# Altium PCB MDBT42Q - Copy (6).PcbDoc
Units mm, origin at the board's own origin, x right, y up, seen from the top; angles counter-clockwise.
Board outline 105.25 x 26.75 mm, 2 copper layers (Top Layer, Bottom Layer); 38 components, 27 nets, 160 pads, 4 vias.
Unrouted connection lines stored in the file: 1.
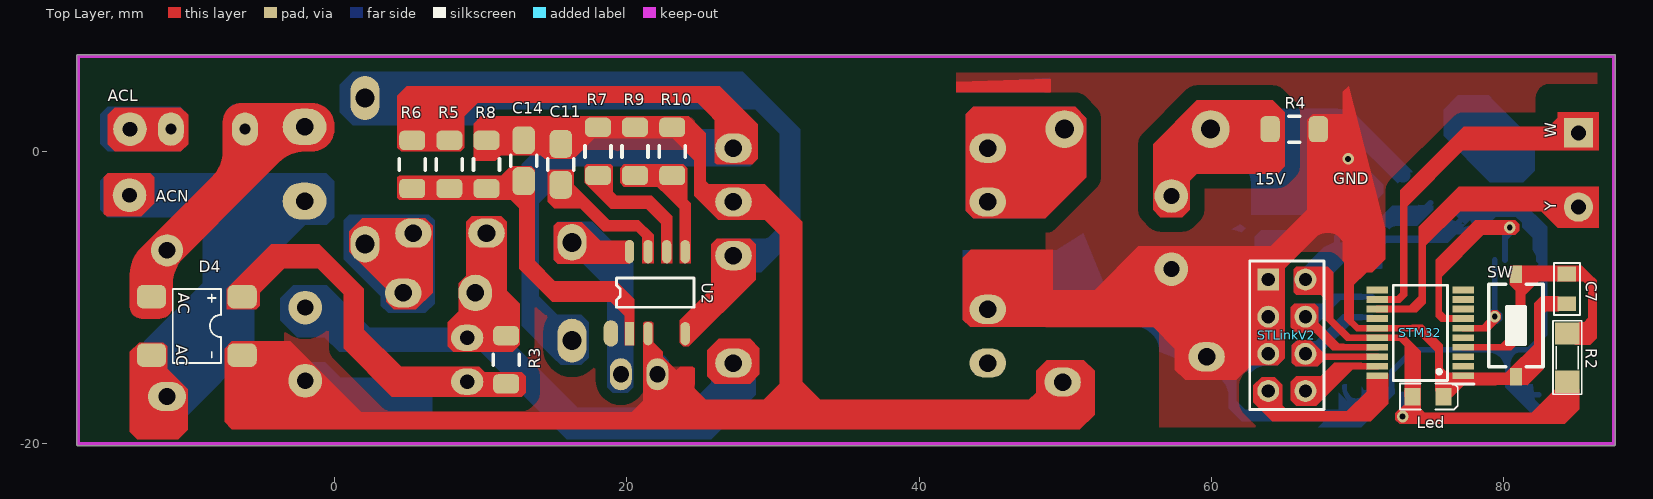
[diagram p0: Top Layer view]
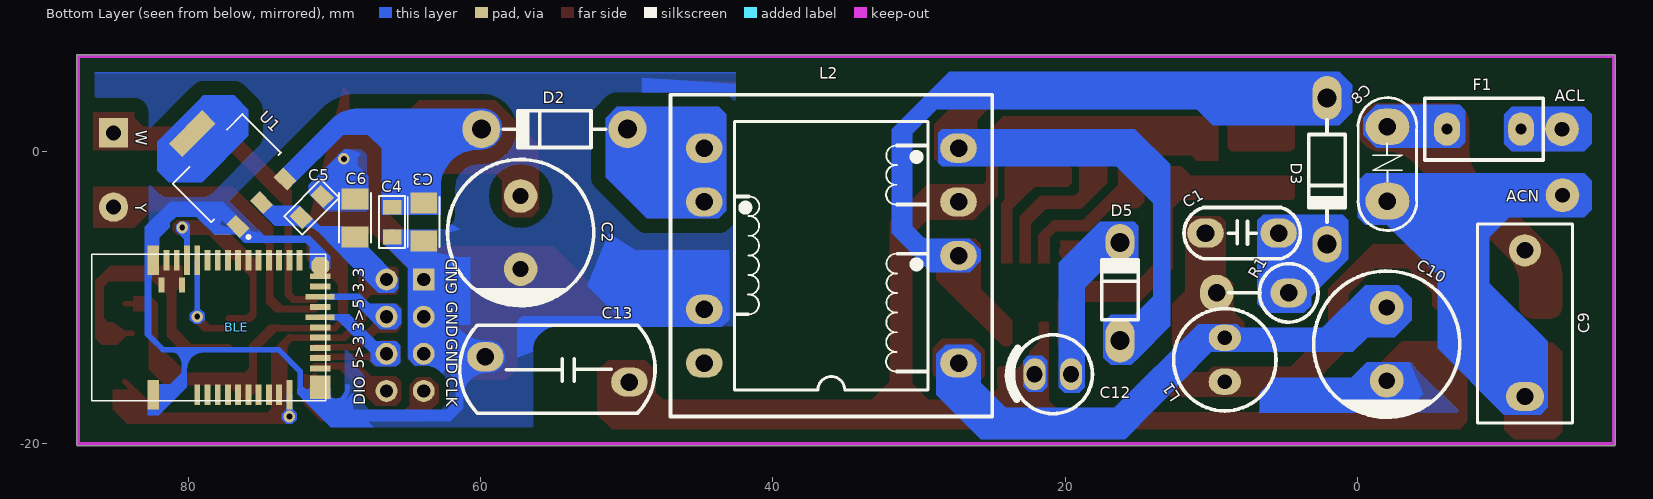
[diagram p1: Bottom Layer view, seen from below]

## Layer stack, top to bottom
Top Solder: solder mask 0.0102, Solder Resist, Dk 3.5
Top Layer: signal copper 0.0356
Dielectric1: dielectric 0.32, FR-4, Dk 4.8
Bottom Layer: signal copper 0.0356
Bottom Solder: solder mask 0.0102, Solder Resist, Dk 3.5

## Board outline
-17.5,-20.127 cw(c-17.5,-20) -17.627,-20 -17.627,6.5 cw(c-17.5,6.5) -17.498,6.627 87.5,6.627 cw(c87.5,6.5) 87.627,6.5 87.627,-20 cw(c87.5,-20) 87.5,-20.127

## Design rules (kind name [scope] priority, off if disabled: settings)
Clearance [All] p1: gap=1 ignorepadtopadclearanceinfootprint=FALSE
PlaneClearance [All] p1: clearance=1
PlaneConnect [All] p1: planeconnectstyle=Direct reliefexpansion=0.508 reliefentries=4 reliefconductorwidth=0.254 reliefairgap=0.254
PolygonConnect [All] p1: connectstyle=Direct reliefconductorwidth=0.254 reliefentries=4 polygonreliefangle="90 Angle" airgapwidth=0.254
RoutingVias [All] p1: holewidth=0.711 width=1.27 viastyle="Through Hole" minholewidth=0.711 minwidth=1.27 maxholewidth=0.711 maxwidth=1.27
SolderMaskExpansion [All] p1: expansion=0.102
Width [All] p1: maxlimit=1.016 minlimit=0.254 preferedwidth=0.635 minimp=50.000000 maximp=50.000000 favimp=50.000000
28 further rules are at their usual default settings.

## Components (designator, comment, footprint, x,y, rotation, side; value= is the part's Value field where it differs from the comment)
BLE "MODULE_MDBT42Q" PCB_MDBT42Q_10X16 86.572,-12.037 r90 bottom
C1 "1nF/1KV" 1nF/1KV 7.914,-5.588 r180 bottom
C2 "220uF/25V" 220uF/25V 57.252,-5.552 r90 bottom
C3 "C3216X5R1A106K160AB" CAPC3216X180 63.881,-4.826 r270 bottom
C4 "2u2" 0805C-GENERIC 66.04,-4.077 r270 bottom
C5 "2u2" 0805C-GENERIC 72.083,-4.342 r135 bottom
C6 "C3216X5R1A106K160AB" CAPC3216X180 68.58,-4.547 r90 bottom
C7 "10u" 0805C-GENERIC 84.303,-8.636 r270 top
C8 "FNR07K561" FNR07K561 -12.453,-68.342 r270 bottom
C9 "104/305V MKP" "104/305V MKP" -11.43,-11.764 r270 bottom
C10 "4.7uF/400V" 4.7uF/400V -1.981,-13.183 r180 bottom
C11 "68pF/50V" Cap_X 15.494,-0.889 r0 top
C12 "10uF/50V" 10uF/50V 20.848,-15.24 r180 bottom
C13 "2.2nF" "CAP ISOLATOR" 54.737,-14.91 r180 bottom
C14 "68pF/50V" Cap_X 12.954,-0.635 r0 top
D2 "SF18G" SF18G 54.944,1.524 r90 bottom
D3 "FR107" FR107 2.108,-1.346 r0 bottom
D4 "ABS16" ABS16 -9.398,-11.938 r270 top
D5 "FR107" "RF107 dung" 16.256,-9.581 r180 bottom
F1 "1A" "Cau chi hop 1A" -8.636,1.524 r180 bottom
L1 "3mH" INDUCTOR_x 9.093,-14.249 r270 bottom
L2 "EFD20" MBA-9 36.004,-7.128 r180 bottom
Led "LED SMD" LED_0805_Blue 74.803,-16.764 r0 top (schematic designator D1)
R1 "120K ohm" "R1W dung" 7.722,-9.677 r90 bottom value=1K
R2 "RESISTOR SMD" RES-SM-1206 84.328,-12.446 r270 top value=1K
R3 "5K6" RES_X#1 11.76,-14.249 r90 top
R4 "10K" RES_X#2 65.657,1.524 r180 bottom
R5 "33K" RES_X#1 7.874,-0.887 r270 top
R6 "33K" RES_X#1 5.334,-0.887 r270 top
R7 "0R" RES_X#1 18.034,0 r90 top
R8 "5K6" RES_X#1 10.414,-0.891 r90 top
R9 "2R7" RES_X#1 20.574,0 r270 top
R10 "2R7" RES_X#1 23.114,0 r90 top
STLinkV2 "Header 4X2" HDR2X4 63.881,-8.763 r270 top
STM32 "STM32F070F6P6" SOP65P640X120-20N 74.278,-12.405 r180 top
SW "SW-SMD" SW-SMD 80.823,-11.907 r270 top
U1 "AMS1117-3.3" SOT229P700X180-4N 77.343,-1.143 r135 bottom
U2 "IC MP024-10" MP024-10 22.098,-9.652 r0 bottom

## Footprints (in the part's own frame and the unit in brackets; to place one, negate y for a bottom-side part, rotate by r counter-clockwise, add the part's x,y. Pads: shape width x height; smd on the part's side, far side on the other; paste and mask are expansions set on the pad)
1nF/1KV [mm]
  oval 2.5x2 hole 1.2: 1(-2.5,0) 2(2.5,0)
  silkscreen extent -3.97,-1.75 3.99,1.75
4.7uF/400V [mm]
  round 2.3 hole 1.1 mask+0.127: 1(0,2.5) 2(0,-2.5)
  silkscreen extent -5,-5.02 5,5
10uF/50V [mm]
  oval 1.5x2.2 hole 1.1 mask+0.106: 1(1.25,0) 2(-1.25,0)
  silkscreen extent -3.05,-2.7 2.7,2.7
"104/305V MKP" [mm]
  round 2.2 hole 1.15: 1(-5,0)
  oval 2x2.6 hole 1.15: 2(5,0)
  silkscreen extent -6.8,-3.25 6.8,3.25
220uF/25V [mm]
  round 2.3 hole 1.1 mask+0.127: 1(2.5,0) 2(-2.5,0)
  silkscreen extent -5.02,-5 5,5
0805C-GENERIC [mil] "CAPACITOR 0805"
  rect 40x50 smd: 1(-10,0) 2(70,0)
  silkscreen extent -40,-35 100,35, body extent -11,-25 70,25, height 26
ABS16 [mm]
  rrect50% 1.6x2 smd: 1(2,-3.1) 2(-2,3.1) 3(-2,-3.1) 4(2,3.1)
  silkscreen extent -2.54,-1.65 2.54,1.65
"CAP ISOLATOR" [mm]
  oval 2.5x2 hole 1.2: 1(4.925,-0.862) 2(-4.925,0.863)
  silkscreen extent -6.68,-2.99 6.68,3.01
Cap_X [mil] "SMD, no Pol"
  rrect50% 60x75 smd: 1(0,-55) 2(0,55)
  silkscreen extent -35,-15 35,15
CAPC3216X180 [mm]
  rect 1.44x1.82 smd: 1(-1.295,0) 2(1.295,0)
  silkscreen extent -1.7,-1.09 1.7,1.09
"Cau chi hop 1A" [mil]
  oval 70x90 hole 30: 1(-100,0) 2(100,0)
  silkscreen extent -159,-83 160,83
FNR07K561 [mm]
  oval 2.5x3 hole 1.2: 1(-70.018,-10.421)
  oval 2.53x3 hole 1.2: 2(-64.938,-10.421)
  silkscreen extent -72.02,-12.43 -62.93,-8.42
FR107 [mm]
  oval 2x3 hole 1.3: 1(0,-5)
  oval 2x2.5 hole 1.3: 2(0,5)
  silkscreen extent -1.25,-3.5 1.25,3.5
HDR2X4 [mm] "Connector; Header; 4x2 Position"
  rect 1.5x1.5 hole 0.9: 1(0,0)
  round 1.5 hole 0.9: 2(0,2.54) 3(2.54,0) 4(2.54,2.54) 5(5.08,0) 6(5.08,2.54) 7(7.62,0) 8(7.62,2.54)
  silkscreen extent -1.27,-1.27 8.89,3.81, body extent -1.27,-1.27 8.89,3.81, height 7
INDUCTOR_x [mm]
  oval 1.8x2.2 hole 1 mask+0.106: 1(1.5,0) 2(-1.5,0)
  silkscreen extent -3.5,-3.5 3.5,3.5
LED_0805_Blue [mm] "Chip LED, 2-Leads, Body 2.0x1.3mm, IPC Medium Density"
  rect 1.1x1.2 smd: 1(-1.05,0) 2(1.05,0)
  silkscreen extent -1.91,-0.89 2.03,0.89, body extent -1,-0.63 1,0.62, height 0.68
MBA-9 [mm]
  oval 2.5x2 hole 1.2: 1(8.7,-7.35) 3(8.7,0) 4(8.7,3.675) 5(8.7,7.35) 6(-8.7,7.35) 7(-8.7,3.675) 9(-8.7,-3.675) 10(-8.7,-7.35)
  round 0 all layers, no hole: 2(8.7,-3.675)
  silkscreen extent -11,-11 11,11
MP024-10 [mm]
  oval 1x1.8 smd far side: 0(-3.175,2.794)
  rect 0.635x1.6 smd far side: 1(-1.904,2.81)
  oval 0.635x1.6 smd far side: 2(-0.634,2.81) 4(1.906,2.81) 5(1.906,-2.798) 6(0.636,-2.798) 7(-0.634,-2.798) 8(-1.904,-2.798)
  body extent -2.5,-1.99 2.5,2.01, height 1.75
PCB_MDBT42Q_10X16 [mm]
  rect 2x0.8 smd: 1(-4.6,-4.2) 39(4.6,-4.2)
  rect 1.4x0.4 smd: 2(-4.6,-7.2) 3(-4.6,-7.9) 4(-4.6,-8.6) 5(-4.6,-9.3) 6(-4.6,-10) 7(-4.6,-10.7) 8(-4.6,-11.4) 9(-4.6,-12.1) 10(-4.6,-12.8) 25(4.6,-14.2) 26(4.6,-13.5) 27(4.6,-12.8) 28(4.6,-12.1) 29(4.6,-11.4) 30(4.6,-10.7) 31(4.6,-10) 32(4.6,-9.3) 33(4.6,-8.6) 34(4.6,-7.9) 37(4.6,-5.8) 38(4.6,-5.1)
  rect 2x0.4 smd: 11(-4.6,-13.5) 35(4.6,-7.2) 36(4.6,-6.5)
  rect 1.4x1.4 smd: 12(-4.2,-15.6)
  rect 0.4x1.4 smd: 13(-3.5,-15.6) 14(-2.8,-15.6) 15(-2.1,-15.6) 16(-1.4,-15.6) 17(-0.7,-15.6) 18(0,-15.6) 20(1.4,-15.6) 22(2.8,-15.6) 23(3.5,-15.6)
  rect 0.4x2 smd: 19(0.7,-15.6) 21(2.1,-15.6)
  oct 1.2x1.2 smd: 24(4.2,-15.6)
  rect 1x0.4 smd: 40(2.9,-4.75) 41(2.9,-6.15)
  silkscreen extent -5,-16 5,0
"R1W dung" [mm]
  oval 2x2.5 hole 1.2: 1(0,-3)
  oval 2.5x2.3 hole 1.2: 2(0,1.93)
  silkscreen extent -2,-5 2,1.1
RES-SM-1206 [mil]
  rect 60x65 smd: 1(0,0) 2(130,0)
  silkscreen extent -34,-38 164,39, body extent 2,-31 128,31, height 40
RES_X#1 [mm]
  rrect50% 1.32x1.778 smd: 1(-1.649,0) 2(1.649,0)
  silkscreen extent -0.38,-0.89 0.38,0.89
RES_X#2 [mm]
  rrect50% 1.32x1.778 smd far side: 1(-1.649,0) 2(1.649,0)
"RF107 dung" [mm]
  oval 2x3 hole 1.3: 1(0,-3.358)
  oval 2x2.5 hole 1.3: 2(0,3.358)
  silkscreen extent -1.25,-1.94 1.27,2.17
SF18G [mm]
  round 2.6 hole 1.3: 1(0,-5) 2(0,5)
  silkscreen extent -1.25,-3.5 1.25,3.5
SOP65P640X120-20N [mm]
  rect 1.475x0.45 smd: 1(-2.938,2.925) 2(-2.938,2.275) 3(-2.938,1.625) 4(-2.938,0.975) 5(-2.938,0.325) 6(-2.938,-0.325) 7(-2.938,-0.975) 8(-2.938,-1.625) 9(-2.938,-2.275) 10(-2.938,-2.925) 11(2.938,-2.925) 12(2.938,-2.275) 13(2.938,-1.625) 14(2.938,-0.975) 15(2.938,-0.325) 16(2.938,0.325) 17(2.938,0.975) 18(2.938,1.625) 19(2.938,2.275) 20(2.938,2.925)
  silkscreen extent -3.68,-3.25 1.85,3.5, body extent -2.25,-3.3 2.25,3.3
SOT229P700X180-4N [mm]
  rect 0.93x1.31 smd: 1(-2.29,-3.345) 2(0,-3.345) 3(2.29,-3.345)
  rect 3.24x1.31 smd: 4(0,3.345)
  silkscreen extent -3.36,-4.47 3.36,1.86
SW-SMD [mm] "Switch SMD type"
  rect 1.2x0.8 smd: 1(-3.5,0) 2(3.5,0)
  silkscreen extent -2.82,-1.85 2.82,1.85, body extent -3.05,-1.85 3.05,1.85, height 2.5

## Part data
BLE: "MDBT42Q"
C1 C11 C13 C14: library part CAP, "Capacitor"
C2 C10 C12: library part ELECTRO0
C3: "C Series 1206 10 uF 10 V ±10 % Tolerance X5R SMT Multilayer Ceramic Capacitor. T? Tantalium", Package="1206 TDK", Availability=Unavailable, MF=TDK, MP=C3216X5R1A106K160AB, Price="0.19 USD", SnapEDA_Link=https://www.snapeda.com/parts/C3216X5R1A106K160AB/TDK/view-part/?ref=snap
C4 C5 C7: library part 0805C-2U2-6V3-X5R-PAN, "CAPACITOR 0805 CERAMIC", Manufacturer="Panasonic - ECG", Manufacturer Part Number=ECJ-1VB0J225K, Supplier Part Number 1=PCC2273TR-ND, Reel=C7, Supplier 1=Digi-Key
C6: "C Series 1206 10 uF 10 V ±10 % Tolerance X5R SMT Multilayer Ceramic Capacitor", Package="1206 TDK", Availability=Unavailable, MF=TDK, MP=C3216X5R1A106K160AB, Price="0.19 USD", SnapEDA_Link=https://www.snapeda.com/parts/C3216X5R1A106K160AB/TDK/view-part/?ref=snap
C8 C9: library part Cap, "Capacitor"
D2: library part DIODE, "Diode"
D3 D5: library part DIODE0
D4: library part BRIDGE1, "Diode Bridge"
F1: library part Res, "Resistor"
L1: library part INDUCTOR1
L2: library part TRANS-EE
Led: "LED"
R1: library part RESC, "Resistor"
R2: "Resistor"
R3 R4 R5 R6 R7 R8 R9 R10: library part RES1A
STLinkV2: "Header, 4-Pin, Dual row", LatestRevisionDate=17-Jul-2002, LatestRevisionNote="Re-released for DXP Platform.", Publisher="Altium Limited"
STM32: "STMICROELECTRONICS - STM32F070F6P6 - MCU, 32BIT, CORTEX-M0, 48MHZ, TSSOP-20", Manufacturer_Name=STMicroelectronics, Arrow Part Number=STM32F070F6P6, Arrow Price/Stock=https://www.arrow.com/en/products/stm32f070f6p6/stmicroelectronics, Datasheet Link=http://www.st.com/content/ccc/resource/technical/document/datasheet/31/4f/10/5f/a5/32/46/42/DM00141386.pdf/files/DM00141386.pdf/jcr:content/translations/en.DM00141386.pdf, Geometry.Height=1.2mm, Manufacturer_Part_Number=STM32F070F6P6
SW: "Switch", LatestRevisionDate=17-Jul-2002, LatestRevisionNote="Re-released for DXP Platform.", PackageReference=SPST-2, Published=24-Mar-1999, Publisher="Altium Limited"
U1: "Sot223/Pkg 1-Amp 3.3-Volt Low Drop Out Voltage Regulatator", Package=None, Availability=Unavailable, MF="Advanced Monolithic Systems", MP=AMS1117-3.3, Price=None, SnapEDA_Link=https://www.snapeda.com/parts/AMS1117-3.3/Advanced%20Monolithic%20Systems/view-part/?ref=snap

## Free pads (board coordinates)
  rect 2x2 hole 1.016: 4(85.09,1.27)
  round 2 hole 1.016: 5(85.09,-3.81)
  round 2.3 hole 1: 7(-13.97,1.524) 8(-14,-3)

## Via types
v1: diameter 0.8, hole 0.4, Top Layer to Bottom Layer, 4 vias

## Nets (pads, with @x,y where several pads share a name; then routed paths per layer and width w, separated by ;. In a path a pad name is that pad's centre, name@x,y a point inside that pad or via, vN(x,y) a via of type N, cw(c..) or ccw(c..) an arc to the next point about the centre after c; other vN are vias at no path point)
32>52: BLE.21 STLinkV2.4 STM32.17 | length 10.9
  Top Layer w0.381: STLinkV2.4 68.498,-13.38
  Top Layer w0.45: 68.498,-13.38 STM32.17
  Bottom Layer w0.381: STLinkV2.4 67.128,-11.303 68.494,-9.937 BLE.21
52>32: BLE.19 STLinkV2.6 STM32.18 | length 10.6
  Top Layer w0.381: STLinkV2.6 STLinkV2.6@66.608,-14.03
  Top Layer w0.45: STLinkV2.6@66.608,-14.03 STM32.18
  Bottom Layer w0.381: STLinkV2.6 66.911,-13.843 69.417,-11.337 BLE.19
+3.3V: BLE.11 C5.1 C6.1 Led.1 R2.2 STLinkV2.2 STM32.16 U1.2 | length 40.5
  Top Layer w0.381: STLinkV2.2 67.691,-8.763 68.112,-9.184 68.112,-11.47 69.372,-12.73 ; 72.928,-12.73 73.753,-13.555 Led.1 ; v1(73.072,-18.132) 81.864,-18.212 R2.2 ; 73.753,-17.492 73.753,-17.451
  Top Layer w0.4: v1(73.072,-18.132) 73.753,-17.451 Led.1
  Top Layer w0.45: 69.372,-12.73 STM32.16 72.928,-12.73
  Bottom Layer w0.381: STLinkV2.2 68.58,-6.604 C6.1 70.496,-5.842 71.817,-4.521 C5.1 73.965,-4.521 U1.2
  Bottom Layer w0.4: v1(73.072,-18.132) BLE.11
+15V: C2.1 C3.1 C4.1 D2.2 R4.2 U1.3 | length 32
  Top Layer w1.016: C2.1 57.252,-0.737 59.512,1.524 D2.2 ; 63.881,-0.508 64.008,-0.381 R4.2
  Bottom Layer w0.381: C3.1 64.173,-3.823 C4.1
  Bottom Layer w1.016: D2.2 61.849,1.524 63.881,-0.508 ; C4.1 65.748,-3.531 C3.1 63.881,-0.508 ; U1.3@73.101,-1.632 69.691,1.778 66.167,1.778 63.881,-0.508
CLK: STLinkV2.7 STM32.20 | length 10.3
  Top Layer w0.381: STLinkV2.7 63.881,-17.399 64.549,-18.067 69.355,-18.067 71.34,-16.081 STM32.20
DIO: STLinkV2.8 STM32.19 | length 5.6
  Top Layer w0.45: STLinkV2.8 67.125,-16.383 68.828,-14.68 STM32.19
DRAIN: D3.1 L2.3 U2.4 | length 48.1
  Top Layer w0.635: U2.4 27.304,-9.162 L2.3
  Bottom Layer w1.016: D3.1 28.909,3.654 31.217,1.346 31.217,-5.41 29.499,-7.128 L2.3
GND: C10.2 C11.2 C12.2 C13.1 C14.2 D4.4 L2.4 R7.2 R8.2 R9.1 R10.2 U2.2 | length 104.1
  Top Layer w0.635: C14.2@12.95,0.758 C14.2 ; U2.2 21.464,-13.336 22.098,-13.97 C12.2 ; R10.2 23.863,1.649 25.004,0.508 25.004,-2.144 26.313,-3.453 L2.4
  Top Layer w1.016: D4.4@-6.315,-13.955 -4.587,-15.683 C10.2 0.65,-18.313 23.343,-18.313 24.13,-17.526 ; R8.2 C14.2@12.95,0.758 ; C14.2 14.732,0.762 15.24,0.254 C11.2 16.635,1.649 R7.2 R10.2 ; C12.2 22.098,-15.494 24.13,-17.526 ; L2.4 29.742,-3.453 31.242,-4.953 31.242,-16.307 30.023,-17.526 ; C13.1 48.058,-17.526 30.023,-17.526 ; 24.13,-17.526 30.023,-17.526
GND2: BLE.1 BLE.12 BLE.24 BLE.39 C2.2 C3.2 C4.2 C5.2 C6.2 C7.2 C13.2 L2.9 Led.2 R4.1 STLinkV2.1 STLinkV2.3 STLinkV2.5 STM32.1 STM32.15 SW.2 U1.1 | length 146.4
  Top Layer w0.381: STLinkV2.1 69.342,-3.302 ; v1@69.215,-0.381 v1(69.342,-0.508) 69.342,-3.302 ; 69.992,-12.08 69.342,-11.43 69.342,-3.302 ; 74.056,-12.08 75.573,-13.597 75.573,-14.847 76.056,-15.33 ; Led.2 77.216,-15.401 STM32.1 ; SW.2@80.745,-15.33 SW.2 ; SW.2@80.823,-15.502 82.372,-13.953 82.372,-11.227 83.185,-10.414 C7.2
  Top Layer w0.45: 69.992,-12.08 STM32.15 74.056,-12.08 ; 76.056,-15.33 STM32.1 SW.2@80.745,-15.33
  Top Layer w1.016: L2.9 52.976,-10.803 55.728,-8.052 C2.2 63.17,-8.052 STLinkV2.1 STLinkV2.3 ; C13.2 61.137,-14.047 STLinkV2.3 ; STLinkV2.5 STLinkV2.3 ; R4.1 67.31,1.524 v1@69.215,-0.381
  Bottom Layer w0.381: 63.119,-13.843 61.468,-15.494 61.468,-17.272 62.263,-18.067 69.708,-18.067 BLE.12@70.891,-16.884 ; BLE.12 70.972,-16.803 BLE.12@70.891,-16.884 ; BLE.24 70.972,-6.949 71.883,-6.038 75.687,-6.038 U1.1 77.61,-4.115 80.77,-4.115 82.372,-5.717 BLE.39 82.677,-7.742 82.677,-12.587 81.712,-13.552 80.264,-13.552 ; BLE.1 81.661,-16.637 80.264,-15.24 80.264,-13.552 ; BLE.12@70.891,-16.884 71.864,-16.884 72.339,-16.408 72.339,-15.037 73.824,-13.552 80.264,-13.552
  Bottom Layer w1.016: 63.119,-13.843 STLinkV2.5 ; STLinkV2.5@63.881,-13.85 STLinkV2.5 ; C4.2 65.774,-6.121 C3.2 STLinkV2.5 ; C6.2 C6.2@68.748,-3.084 ; v1(69.342,-0.508) 69.342,-2.49 C6.2@68.748,-3.084 ; C5.2 C6.2@68.748,-3.084
MD_RESET: BLE.35 STM32.6 | length 6.3
  Top Layer w0.381: 78.598,-12.08 v1@79.375,-11.303
  Top Layer w0.45: STM32.6 78.598,-12.08
  Bottom Layer w0.381: v1(79.372,-11.3) v1@79.375,-11.303
  Bottom Layer w0.4: v1(79.372,-11.3) BLE.35
NetC1_1: C1.1 C10.1 L1.2 L2.1 R1.2 R3.2 | length 47.1
  Top Layer w1.016: L1.2 11.611,-12.749 R3.2 11.76,-10.897 10.541,-9.677 R1.2 9.652,-6.35 C1.1
  Bottom Layer w1.016: C10.1 0.086,-12.749 L1.2 10.971,-12.749 13.487,-15.265 13.487,-16.002 15.672,-18.186 25.552,-18.186 27.304,-16.435 L2.1 L2.1@27.304,-14.35
NetC1_2: C1.2 D3.2 R1.1 | length 8.7
  Top Layer w1.016: R1.1@4.922,-10.16 R1.1@5.414,-9.668
  Bottom Layer w1.016: D3.2 2.866,-5.588 C1.2 5.414,-8.985 R1.1
NetC7_1: C7.1 R2.1 STM32.4 SW.1 | length 19.4
  Top Layer w0.381: 80.27,-13.38 81.204,-12.446 81.204,-8.788 SW.1 ; SW.1@80.899,-8.382 C7.1 85.496,-8.382 85.979,-8.865 85.979,-12.116 85.649,-12.446 R2.1 R2.1@83.82,-12.446
  Top Layer w0.45: STM32.4 80.27,-13.38
NetC8_1: C8.1 C9.1 D4.3 F1.1 | length 19.2
  Top Layer w1.016: D4.3 -12.498,-7.832 C9.1 -11.336,-6.764 -6.096,-1.524 F1.1 -2.184,1.524 C8.1 C8.1@-2.896,1.676
NetC8_2: C8.2 C9.2 D4.1 pad.8 | length 19.7
  Top Layer w1.016: D4.1 -12.498,-15.696 C9.2
  Bottom Layer w1.016: C9.2@-11.227,-15.994 -8.23,-12.997 -8.23,-10.262 -2.032,-4.064 C8.2
NetC11_1: C11.1 U2.7 | length 8.5
  Top Layer w0.635: C11.1 15.748,-2.286 18.542,-5.08 20.701,-5.08 21.464,-5.843 U2.7
NetC12_1: C12.1 D5.2 U2.8 | length 14.3
  Top Layer w1.016: D5.2 16.887,-6.854 U2.8@19.939,-6.854
  Bottom Layer w1.016: D5.2 19.598,-9.565 C12.1
NetC14_1: C14.1 R5.2 R6.2 R8.1 U2.1 | length 22.9
  Top Layer w0.635: R6.2 R5.2 10.41,-2.536 R8.1 12.7,-2.54 12.954,-2.286 12.954,-7.366 15.24,-9.652 18.714,-9.652 20.194,-11.132 U2.1
NetD2_1: D2.1 L2.7 | length 16.5
  Top Layer w1.016: L2.7 46.585,-3.453 49.944,-0.094 D2.1
  Bottom Layer w1.016: L2.7 46.585,-3.453 49.944,-0.094 D2.1
NetD4_2: D4.2 L1.1 R3.1 | length 24.4
  Top Layer w1.016: D4.2 -3.599,-7.239 -0.965,-7.239 1.321,-9.525 1.321,-12.395 4.675,-15.749 L1.1 11.611,-15.749 R3.1
NetD5_1: D5.1 L2.5 R5.1 R6.1 | length 54.2
  Top Layer w1.016: R5.1 R6.1 8.382,3.81 25.066,3.81 27.304,1.572 L2.5
  Bottom Layer w1.016: D5.1 13.462,-10.145 13.462,-3.277 16.961,0.222 L2.5
NetF1_2: F1.2 pad.7 | length 5.6
  Top Layer w1.016: pad.7 F1.2
  Bottom Layer w1.016: pad.7 F1.2
NetR7_1: R7.1 U2.6 | length 8.4
  Top Layer w0.635: R7.1 18.034,-2.159 19.431,-3.556 21.59,-3.556 22.734,-4.7 U2.6
NetR9_2: R9.2 R10.1 U2.5 | length 8.1
  Top Layer w0.635: R10.1 23.114,-2.794 24.004,-3.684 U2.5
  Top Layer w1.016: R9.2 R10.1
PWM_WHITE: pad.4 STM32.12 | length 22.3
  Top Layer w0.381: 72.674,-10.13 73.152,-9.652 73.152,-3.073 77.495,1.27 pad.4
  Top Layer w0.45: STM32.12 72.674,-10.13
PWM_YELLOW: pad.5 STM32.13 | length 19
  Top Layer w0.381: 73.548,-10.78 74.422,-9.906 74.422,-6.045 76.759,-3.708 84.988,-3.708 pad.5
  Top Layer w0.45: STM32.13 73.548,-10.78
SWDCLK: BLE.36 STM32.7 | length 13
  Top Layer w0.381: 75.946,-11.43 75.55,-11.034 75.55,-8.317 78.595,-5.271 v1@80.391,-5.271
  Top Layer w0.45: 75.946,-11.43 STM32.7
  Bottom Layer w0.4: BLE.36 80.072,-5.526 v1(80.391,-5.207)
pads on no net: BLE.2 BLE.3 BLE.4 BLE.5 BLE.6 BLE.7 BLE.8 BLE.9 BLE.10 BLE.13 BLE.14 BLE.15 BLE.16 BLE.17 BLE.18 BLE.20 BLE.22 BLE.23 BLE.25 BLE.26 BLE.27 BLE.28 BLE.29 BLE.30 BLE.31 BLE.32 BLE.33 BLE.34 BLE.37 BLE.38 BLE.40 BLE.41 L2.2 L2.6 L2.10 STM32.2 STM32.3 STM32.5 STM32.8 STM32.9 STM32.10 STM32.11 STM32.14 U1.4 U2.0

## Polygon pours and split planes (outlines as drawn)
GND2 on Top Layer "NONET_L-01_P-001" (solid, pour order 21): 42.545,6.5 42.545,-12.014 56.413,-12.014 56.413,-20 87.5,-20 87.5,6.5 87.376,6.5
GND on Top Layer "NONET_L-01_P-001" (solid, remove dead copper, pour order 19): -17.5,6.5 29.21,6.5 29.21,-20 -17.5,-20
no net on Top Layer "NONET_L-01_P-001" (solid, pour order 17): -17.145,6.223
no net on Top Layer "NONET_L-01_P-001" (solid, pour order 15): 81.941,0.064
no net on Top Layer "NONET_L01_P011" (solid, pour order 11): -5.58,-16.191
GND2 on Top Layer "GND2_L01_P001" (solid, pour order 1): -4.546,-17.92
GND2 on Bottom Layer "NONET_L-01_P-001" (solid, pour order 27): 87.5,-20 56.388,-20 56.388,-11.963 42.545,-11.963 42.545,6.5 87.5,6.5
GND on Bottom Layer "NONET_L-01_P-001" (solid, remove dead copper, pour order 23): -17.5,6.5 29.845,6.5 29.845,-20 -17.5,-20
no net on Bottom Layer "NONET_L-01_P-001" (solid, pour order 25): 42.545,5.363 86.363,5.363

## Keep-outs
Keep-Out Layer:
  lines w0.254: -17.5,-20 -17.5,6.5 87.5,6.5 87.5,-20 -17.5,-20

## Other copper
Top Layer:
  region net GND2: 67.108,-5.893 cw(c67.871,-6.656) 67.871,-5.576 68.021,-5.576 cw(c68.021,-6.647) 69.088,-6.565 69.088,-11.499 69.893,-12.304 70.05,-12.304 70.036,-11.855 69.723,-11.543 69.723,1.905 69.088,2.54 66.929,2.54 66.548,2.159 66.548,-3.994 64.042,-6.5 55,-6.5 52,-9.5 49.149,-9.5 49.149,-6.731 43.536,-6.731 43,-7.267 43,-10.846 43,-11.5 43.5,-12 56,-12 57.5,-13.5 57.5,-14.921 58.209,-15.63 61.694,-15.63 62.712,-14.612 64.528,-14.612 65,-14.14 65,-8
  region: -5.402,-2.336 -5.393,-2.345 -3.792,-0.744 cw(c-1.996,-2.54) -1.996,0 -1.524,0 ccw(c-1.524,1.524) 0,1.524 0,1.778 ccw(c-1.524,1.778) -1.524,3.302 -6.35,3.302 ccw(c-6.35,2.032) -7.62,2.032 -7.62,0.036 cw(c-10.16,0.036) -8.364,-1.76 -13.226,-6.622 ccw(c-11.43,-8.418) -13.97,-8.418 -13.97,-10.668 ccw(c-13.208,-10.668) -13.208,-11.43 -11.938,-11.43 ccw(c-11.938,-10.541) -11.049,-10.541 -11.049,-9.053 cw(c-8.509,-9.053) -10.305,-7.257 -5.57,-2.522 ccw(c-7.366,-0.726)
  region net GND2: 42.545,4.765 42.545,4.057 49.017,4.057 49.017,4.986
  region: 78.593,-12.305 78.968,-12.305 79.785,-11.488 79.785,-11.119 79.54,-10.874 79.202,-10.874 78.957,-11.119 78.957,-11.419 78.364,-12.013 77.232,-12.013
  region net GND2: 71.889,-5.285 71.889,-7.359 70.993,-8.255 70.612,-8.255 69.672,-9.195 69.367,-8.89 69.088,-8.89 69.088,-7.591 68.965,-7.468 68.965,4.068 69.367,4.47
  pour cut-out: 73.804,-17.098 74.302,-16.165 74.16,-16.307 73.455,-16.307 73.455,-16.748
  region net +3.3V: 84.141,-18.634 85.152,-17.624 85.152,-16.316 83.883,-16.316 83.795,-16.404 83.795,-16.203 83.577,-16.203 81.899,-17.881 74.589,-17.881 74.303,-17.597 74.303,-13.663 73.142,-12.502 72.908,-12.502 72.801,-12.918 73.204,-13.32 73.204,-16.307 73.195,-16.316 73.204,-17.291 72.573,-17.923 72.568,-18.341 72.861,-18.634
  pour cut-out: 51.938,-17.898 52,-17.898 51.882,-17.842
  region net GND: 24.5,-19 51,-19 52,-18 52,-17.898 51.938,-17.898 51.882,-17.842 52,-17.898 52,-15 51.275,-14.275 48.725,-14.275 48,-15 48,-16.5 47.5,-17 25.413,-17 24.593,-16.18 24.645,-15.852 24.645,-14.84 24.518,-14.713 23.666,-14.713 23.396,-14.983 22.47,-14.057 22.47,-13.707 21.8,-13.037 21.8,-11.726 21.713,-11.639 21.221,-11.639 21.148,-11.712 21.148,-11.964 21.145,-12.205 21.145,-17.054 20.072,-18.128 2.128,-18.128 -3,-13 -7,-13 -7.5,-13.5 -7.5,-18.5 -7,-19
  region net GND: 24.781,-18.527
  region net GND: 24.638,-0.609 24.638,-3.048 26.264,-4.674 29.439,-4.674 30.48,-5.715 30.48,-15.875 29.337,-17.018 33.274,-17.018 32.004,-15.748 32.004,-4.826 29.439,-2.261 25.629,-2.261 25.4,-2.032 25.4,1.255 24.242,2.413 16.637,2.413 10.033,2.413 9.525,1.905 9.525,-0.635 11.012,-0.635 11.012,-0.642 11.401,-0.254 14.126,-0.254 14.38,-0.508 16.383,-0.508 17.78,0.889 23.14,0.889
  region net NetC11_1: 16.84,-3.886 18.412,-5.458 20.955,-5.458 21.082,-5.585 21.082,-7.658 21.844,-7.658 21.844,-5.715 20.828,-4.699 18.796,-4.699 16.383,-2.286 16.383,-1.27 14.605,-1.27 14.605,-3.429 15.062,-3.886
  region net PWM_YELLOW: 83.49,-0.787
  region net NetC1_1: 28.448,-12.827 29.083,-13.462 29.083,-15.24 28.448,-15.875 26.035,-15.875 25.527,-15.367 25.527,-13.589 26.289,-12.827
  region: 43.18,-2.769 43.18,-4.064 43.688,-4.572 48.641,-4.572 51.444,-1.769 51.444,2.277 50.673,3.048 43.688,3.048 43.18,2.54 43.18,-2.769
  region: 86.131,-5.944
  region net SWDCLK: 76.004,-11.652 75.673,-11.652 75.339,-11.319 75.339,-7.403 78.044,-4.699 80.061,-4.699 80.772,-4.699 81.046,-4.973 81.046,-5.441 80.772,-5.715 78.589,-5.715 75.744,-8.56 75.742,-10.946 76.004,-11.209
  region net NetC1_2: 6.223,-4.572 6.731,-5.08 6.731,-9.652 5.588,-10.795 4.064,-10.795 3.556,-10.287 3.556,-9.398 1.016,-6.858 1.016,-5.461 1.905,-4.572
  region net PWM_YELLOW: 83.693,-5.207 86.487,-5.207 86.487,-2.413 76.911,-2.413 74.168,-5.156 74.168,-10.033 73.501,-11.005 74.046,-11.005 74.659,-10.392 74.659,-6.427 77.005,-4.081 82.567,-4.081
  pour cut-out: 73.004,-4.287 73.152,-6.541 73.152,-4.404 73.136,-4.419
  region net PWM_WHITE: 72.643,-10.35 72.894,-10.35 73.371,-9.874 73.371,-3.748 77.182,0.064 86.487,0.064 86.487,2.667 83.693,2.667 83.693,2.286 83.078,1.671 77.236,1.671 72.898,-2.667 72.898,-4.181 72.898,-9.878 72.912,-9.892 72.674,-10.13 72.577,-10.033 72.263,-10.033
  pour cut-out: 73.152,-3.175 72.898,-2.667 73.152,-6.541
  region: 72.898,-2.708
  region: 72.898,-2.708
  pour cut-out: 85.803,-8.5 85.832,-8.5 85.817,-8.485
  region net NetC7_1: 84.069,-12.422 84.854,-13.207 85.915,-13.207 86.329,-12.793 86.329,-8.827 85.899,-8.403 85.31,-7.807 80.703,-7.807 80.427,-7.806 80.391,-7.842 80.391,-9.106 80.823,-9.538 80.823,-12.141 79.629,-13.335 79.674,-13.38 80.03,-13.38 79.983,-13.602 80.499,-13.602 81.446,-12.655 81.446,-9.814 82.372,-8.888 83.804,-8.888 85.414,-8.885 85.78,-9.246 85.78,-11.391 85.487,-11.685 85.152,-11.685
  region net GND2: 79.477,-16.006 81.597,-16.006 82.693,-14.911 82.693,-13.289 82.337,-12.933 80.129,-15.14 79.685,-15.14 79.438,-15.387 76.882,-15.387 76.216,-15.379 75.798,-14.96 75.798,-13.217 74.436,-11.855 73.705,-11.855 73.705,-12.075 75.302,-13.672 75.302,-16.396 76.049,-17.065 76.049,-16.906 76.199,-17.057 77.25,-16.006
  region net GND2: 82.724,-10.921 83.731,-10.921 83.748,-10.157 83.701,-10.11 83.701,-9.907 82.537,-9.907 82.07,-10.374 82.07,-14.137 82.693,-13.513 82.693,-10.953
  region: 83.674,-10.924
  region net CLK: 70.602,-15.511 70.602,-16.422 69.256,-17.768 65.266,-17.768 64.846,-17.348 64.846,-15.951 64.338,-15.443 63.424,-15.443 62.865,-16.002 62.865,-17.161 64.143,-18.439 70.879,-18.439 72.076,-17.242 72.076,-15.202
  region net CLK: 70.278,-14.455 68.38,-14.455 67.468,-15.367 65.786,-15.367 65.405,-15.748 65.405,-17.018 65.786,-17.399 67.158,-17.399 69.652,-14.905 70.278,-14.905
  region net 52>32: 67.691,-13.805 66.789,-12.903 65.85,-12.903 65.497,-13.257 65.497,-14.442 65.752,-14.697 67.249,-14.697 68.05,-13.896 68.208,-13.896
  region net 32>52: 69.063,-13.157 68.732,-13.157 67.31,-11.735 67.31,-10.668 67.056,-10.414 65.659,-10.414 65.405,-10.668 65.405,-12.04 65.761,-12.395 67.056,-12.395 68.265,-13.605 68.833,-13.605 68.833,-13.588 68.912,-13.509
  region net 32>52: 68.58,-13.157
  region net +3.3V: 69.436,-12.506 68.33,-11.4 68.33,-8.259 67.945,-7.874 65.786,-7.874 65.607,-8.053 65.607,-9.625 65.798,-9.816 67.474,-9.816 67.818,-10.16 67.818,-11.557 69.215,-12.954 69.723,-12.954
  pour cut-out: 64.493,-7.493 65,-8 64.493,-7.493
  pour cut-out: 64.493,-7.493 65,-8 64.493,-7.493
  region: 62.23,-6.477
  region: 58.976,-1.524 64.516,-1.524 65.024,-1.016 65.024,2.667 64.191,3.5 59,3.5 56,0.5 56,-4 56.5,-4.5 58,-4.5 58.5,-4 58.5,-2
  region net NetD5_1: 26.035,-0.762 26.162,-0.889 28.575,-0.889 28.956,-0.508 28.956,1.854 26.365,4.445 4.953,4.445 4.318,3.81 4.318,0.254 4.572,0 8.636,0 8.89,0.254 8.89,2.413 10.16,3.683 10.033,3.81 25.066,3.81 25.066,3.128 26.035,2.159
  region net NetR7_1: 22.352,-4.953 21.336,-3.937 18.923,-3.937 17.145,-2.159 17.145,-1.016 17.272,-0.889 18.923,-0.889 19.05,-1.016 19.05,-2.794 19.304,-3.048 21.717,-3.048 23.114,-4.445 23.114,-7.658 22.352,-7.658
  region net NetC8_2: -15.5,-1.5 -12.597,-1.5 -12.319,-1.778 -12.319,-3.556 -13.208,-4.445 -15.555,-4.445 -15.75,-4.25 -15.75,-1.75
  region: -15.5,-1.5
  region: -10.5,3 -10,2.5 -10,0.5 -10.5,0 -15,0 -15.5,0.5 -15.5,2.5 -15,3
  region: 8.636,1.524
  region net NetD4_2: -5.334,-10.795 -5.08,-10.541 -5.08,-9.652 -3.429,-8.001 -1.143,-8.001 0.635,-9.779 0.635,-13.462 3.937,-16.764 12.827,-16.764 13.081,-16.51 13.081,-15.367 12.827,-15.113 10.287,-15.113 9.906,-14.732 4.572,-14.732 2.032,-12.192 2.032,-9.398 -1.016,-6.35 -4.318,-6.35 -7.366,-9.398 -7.366,-10.795
  region net NetC8_2: -11.43,-14.859 -10.033,-16.256 -10.033,-19.05 -10.668,-19.685 -13.462,-19.685 -13.97,-19.177 -13.97,-13.716 -13.335,-13.081 -11.684,-13.081 -11.43,-13.335
  region net NetC1_1: 8.509,-9.017 9.017,-8.509 9.017,-4.826 9.398,-4.445 11.43,-4.445 11.811,-4.826 11.811,-9.525 12.7,-10.414 12.7,-13.208 12.192,-13.716 8.128,-13.716 7.747,-13.335 7.747,-11.684 8.509,-10.922
  region net NetR9_2: 22.098,-2.413 22.733,-3.048 23.622,-3.937 23.622,-7.658 24.384,-7.658 24.384,-3.556 24.13,-3.302 24.13,-2.159 24.13,-1.143 23.876,-0.889 19.812,-0.889 19.558,-1.143 19.558,-2.159 19.812,-2.413
  region net GND: 33.782,-17.018 34.29,-17.526 34.29,-17.018
  pour cut-out: 16.256,1.016 16.637,1.397 15.748,1.397 15.367,1.016
  region net NetC12_1: 20.213,-7.678 15.271,-7.678 15.006,-7.413 15.006,-5.1 15.26,-4.846 16.911,-4.846 18.181,-6.116 20.34,-6.116
  region net DRAIN: 28.829,-8.763 28.829,-6.35 28.448,-5.969 26.162,-5.969 25.781,-6.35 25.781,-9.398 23.622,-11.557 23.622,-13.081 23.876,-13.335 24.257,-13.335
  region net NetC14_1: 4.445,-3.302 12.065,-3.302 12.7,-3.937 12.7,-4.953 12.964,-5.217 12.964,-7.123 12.944,-7.143 12.638,-7.186 12.638,-8.028 14.897,-10.287 18.933,-10.287 19.874,-11.228 19.874,-13.273 19.996,-13.273 20.512,-13.273 20.512,-10.098 19.286,-8.872 15.095,-8.872 13.716,-7.493 13.716,-1.27 13.462,-1.016 12.065,-1.016 11.43,-1.651 4.445,-1.651 4.318,-1.778 4.318,-3.175
  region: 13.716,-4.953
  region: 4.572,-2.032
  pour cut-out: 51.938,-17.898 52,-17.898 51.882,-17.842
  pour cut-out: 51.938,-17.898 52,-17.898 51.882,-17.842
  pour cut-out: 51.882,-17.842 51.938,-17.898 52,-17.898
  region: -9.398,0
  region: -9.398,0.254
Bottom Layer:
  region net GND2: 70.277,-16.079 70.277,-16.53 cw(c69.84,-16.53) 70.149,-16.839 70.241,-16.931 ccw(c70.427,-16.745) 70.427,-17.008 cw(c70.62,-17.008) 70.484,-16.872 70.63,-16.725
  region net GND2: 70.281,-16.741 cw(c69.885,-16.346) 69.885,-16.905 69.864,-16.905 cw(c69.864,-16.393) 69.502,-16.755 69.484,-16.737 cw(c70.042,-16.18) 69.253,-16.18 69.253,-15.913 69.146,-15.913 ccw(c69.146,-16.2) 68.943,-15.997 ccw(c70.761,-15.997) 69.475,-17.282 69.634,-17.441 69.713,-17.362 cw(c70.068,-17.717) 70.068,-17.215
  region net GND2: 75.213,-5.352 74.901,-5.663 74.901,-6.119
  region net GND2: 79.33,-4.571 78.222,-5.678 75.599,-5.678
  region net GND2: 78.172,-5.678 78.813,-5.037 78.863,-5.037 79.68,-4.22 79.68,-3.81 78.054,-3.81 77.521,-4.343
  region net GND2: 76.717,-4.377 77.357,-5.017 77.913,-4.461 80.809,-4.461 81.24,-4.892 81.24,-5.176 81.973,-5.909 81.973,-6.737 82.372,-7.437 82.524,-7.588 81.976,-8.136 cw(c81.976,-8.649) 82.489,-8.649 82.489,-8.683 ccw(c82.489,-8.623) 82.549,-8.623 82.677,-7.958 82.677,-12.62 81.697,-13.469 80.423,-13.469 ccw(c80.423,-13.529) 80.423,-13.469 ccw(c80.423,-13.529) 80.362,-13.529 80.362,-13.719 80.234,-13.719 ccw(c80.472,-13.419) 80.362,-13.786 80.362,-14.394 ccw(c80.446,-14.394) 80.446,-14.477 cw(c81.189,-14.477) 81.189,-13.734 81.758,-13.734 82.677,-12.847 82.953,-12.581 82.953,-5.166 81.225,-3.438 77.639,-3.438 76.717,-4.36
  region net GND2: 62.583,-15.206 cw(c64.017,-16.64) 64.017,-14.612 64.528,-14.612 ccw(c63.757,-15.383) 63.757,-14.293 62.081,-14.293
  region net GND2: 56.439,-13.716 ccw(c54.686,-13.716) 54.686,-11.963 49.466,-11.963 cw(c50.152,-11.963) 50.152,-11.278 56.998,-11.278 cw(c56.998,-11.76) 57.48,-11.76 57.48,-14.097
  region net PWM_WHITE: 65.607,-9.369 65.89,-9.652 67.001,-9.652 68.939,-7.714 71.075,-5.532 cw(c71.86,-6.208) 71.783,-5.175 71.81,-5.175 cw(c71.81,-5.683) 72.17,-5.324 cw(c72.786,-5.94) 72.786,-5.069 72.921,-5.069 72.825,-4.973 ccw(c72.39,-5.408) 72.39,-4.793 72.083,-4.793 ccw(c72.082,-5.209) 71.835,-4.874 71.82,-4.854 71.989,-4.685 71.469,-4.596 70.944,-5.121 69.462,-5.121 69.462,-5.739 68.961,-6.24 68.345,-6.247 68.335,-6.257 67.683,-6.55 65.607,-8.626
  region net GND2: 78.899,-13.742 cw(c78.899,-14.921) 80.079,-14.921 80.079,-15.25 ccw(c80.079,-15.156) 80.173,-15.156 80.173,-13.719 79.574,-13.719 cw(c79.574,-13.59) 79.445,-13.59
  pour cut-out: 66.071,1.934 68.084,1.934 ccw(c67.5,-0.538) 67.5,2.002 66.599,2.002 ccw(c66.599,-0.082)
  region net +15V: 69.4,1.154 72.74,-2.186 73.331,-1.594 cw(c73.742,-2.005) 73.742,-1.424 ccw(c73.604,-1.424) 73.702,-1.326 70.185,2.191 ccw(c68.389,0.395) 68.389,2.935 59.911,2.935 ccw(c59.911,1.551) 58.528,1.551 ccw(c59.962,1.551) 59.962,0.118 60.181,0.118 cw(c60.181,-2.422) 62.721,-2.422 62.721,-2.516 62.805,-2.915 cw(c63.172,-3.282) 63.172,-2.763 63.851,-2.763 63.851,-2.455 64.878,-3.481 66.763,-2.516 66.763,0.218 67.698,1.154
  region net GND2: 61.194,-17.572 62.06,-18.438 70.033,-18.438 71.587,-16.884 71.666,-16.884 71.585,-16.803 71.809,-16.803 72.344,-16.268 72.344,-15.886 71.952,-16.278 71.777,-16.278 71.672,-16.173 71.015,-16.233 71.013,-16.231 70.986,-16.236 70.972,-16.237 70.972,-16.238 70.272,-16.36 70.272,-16.752 69.351,-17.673 62.307,-17.673 61.694,-17.06 61.694,-15.63 62.712,-14.612 64.528,-14.612 64.954,-14.186 64.954,-7.986 66.665,-6.275 66.665,-5.375 63.406,-5.375 62.96,-5.821 62.96,-9.552 cw(c60.42,-9.552) 62.216,-11.348 61.315,-12.249 cw(c59.622,-10.555) 59.622,-12.95 59.446,-12.95 ccw(c59.446,-14.078) 58.318,-14.078 ccw(c59.385,-14.078) 59.385,-15.145 59.566,-15.145 cw(c59.566,-16.759) 61.18,-16.759 61.18,-17.375 ccw(c61.18,-16.986) 61.194,-17.375
  region net GND2: 81.292,-17.33 81.996,-18.034 82.753,-18.034 82.753,-17.628 81.864,-16.739
  region: 21.464,-12.462
  region: 22.555,-13.97 22.885,-14.3 22.885,-16.053 22.504,-16.434 21.565,-16.434 21.234,-16.104 21.234,-14.3 21.565,-13.97
  region net GND2: 67.668,-3.974 70.648,-3.974 71.756,-2.866 71.756,-2.283 69.328,0.145 68.983,0.145 68.148,-0.127 68.438,-0.416 68.438,-0.93 67.668,-1.7
  region net GND2: 61.971,-4.993 62.336,-5.251 62.078,-5.512 61.366,-5.334
  region: -1.27,3.175 -0.381,2.286 -0.381,1.143 -1.27,0.254 -6.985,0.254 -7.366,0.635 -7.366,2.794 -6.985,3.175
  region net SWDCLK: 80.248,-6.005 80.803,-5.45 80.803,-5.023 80.576,-4.795 80.063,-4.795 79.872,-4.987 79.872,-5.622 80.024,-5.774 80.024,-6.012
  region: 79.87,-5.51
  region net GND2: 78.643,-4.948 79.347,-4.244 78.265,-4.244 77.881,-4.628 77.881,-4.971
  region net GND2: 72.53,-16.249 72.53,-16.577 70.245,-18.863 67.295,-18.863 67.813,-18.346
  region: 72.336,-16.681
  region net GND2: 63.21,-6.885 63.21,-11.861 60.688,-11.861 60.688,-7.254 61.447,-7.254
  region net GND2: 42.545,4.627 42.545,4.057 48.942,4.057 48.942,5.027
  region net GND: -3.562,-14.421 -0.616,-14.421 0.432,-15.469 5.688,-15.469 6.717,-16.498 6.717,-17.863 -3.194,-17.863 -4.496,-16.561
  region net GND2: 50.368,-10.16
  region net GND2: 51.222,-5.581 49.369,-6.756 43,-6.756 43,-11.5 43.5,-12 49.874,-12 52.68,-9.194
  region net NetD2_1: 48.641,-4.572 51.444,-1.769 51.444,2.277 50.673,3.048 43.688,3.048 43.18,2.54 43.18,-2.769 43.18,-4.064 43.688,-4.572
  region net GND2: 70.282,-8.035 71.619,-8.035 71.666,-7.988 71.666,-6.505 71.937,-6.234 76.14,-6.234 77.357,-5.017 76.387,-4.684 75.627,-5.444 74.953,-5.611 74.798,-5.766 71.692,-5.766 70.282,-7.176
  region net GND2: 69.929,-17.095 69.879,-17.145 69.342,-17.145 68.707,-16.51 68.707,-18.034 69.741,-18.034 69.977,-17.798
  region net GND2: 70.033,-18.438 69.608,-18.863 68.901,-18.863 68.326,-18.288
  region net NetD5_1: 17.399,-11.684 16.891,-11.176 15.24,-11.176 13.97,-9.906 13.97,-3.556 16.51,-1.016 26.162,-1.016 28.448,-1.016 28.702,-0.762 28.702,1.27 28.448,1.524 26.162,1.524 15.24,1.524 12.827,-0.889 12.827,-11.938 14.986,-14.097 15.494,-14.605 16.891,-14.605 17.399,-14.097
  region net NetC12_1: 20.447,-7.62 17.653,-4.826 15.28,-4.826 15.006,-5.1 15.006,-7.413 15.271,-7.678 18.346,-7.678 18.669,-8.001 18.669,-16.129 19.05,-16.51 20.066,-16.51 20.447,-16.129
  pour cut-out: 13.487,-14.707 13.208,-14.427 13.208,-15.723 13.487,-16.002
  region net NetC1_1: -3.683,-11.557 -2.54,-12.7 -0.686,-12.7 0.33,-13.716 10.033,-13.716 15.915,-19.685 25.781,-19.685 28.829,-16.637 28.829,-13.843 28.194,-13.208 26.416,-13.208 25.781,-13.843 25.781,-15.811 24.066,-17.526 16.637,-17.526 10.922,-11.811 8.255,-11.811 8.001,-12.065 2.413,-12.065 -0.508,-9.144 -2.794,-9.144 -3.683,-10.033
  region net NetF1_2: -10.541,3.048 -10.033,2.54 -10.033,0.508 -10.541,0 -15.494,0 -16.002,0.508 -16.002,2.54 -15.494,3.048
  region: 6.477,-4.318 6.858,-4.699 6.858,-10.414 6.223,-11.049 3.683,-11.049 3.175,-10.541 3.175,-9.906 0.635,-7.366 0.635,-4.699 1.016,-4.318
  region net NetC8_2: -2,-5 -0.5,-5 0,-4.5 0,-2.032 -0.532,-1.5 -15.5,-1.5 -16,-2 -16,-4 -15.5,-4.5 -10.359,-4.5 -9,-5.859 -9,-9 -13,-13 -13,-17.5 -12.5,-18 -10,-18 -5.461,-13.461 -5.461,-8.461
  region: -11,3.5
  region net DRAIN: 25.781,-7.493 26.543,-8.255 29.21,-8.255 31.877,-5.588 31.877,1.524 27.94,5.461 1.27,5.461 0.381,4.572 0.381,2.667 1.27,1.778 9.906,1.778 10.998,2.87 28.804,2.87 30.48,1.194 30.48,-5.131 29.727,-5.884 29.464,-5.969 26.543,-5.969 25.781,-6.731
  pour cut-out: 30.807,-5.82 31.115,-5.786 31.115,-5.512
  region: 82.967,-8.005
  region: 79.186,3.584 82.101,0.669 82.101,-1.338 81.323,-2.116 79.038,-2.116 75.865,1.057 75.865,2.84 76.849,3.824 78.946,3.824 79.332,3.438
  region net +15V: 62.721,-4.328 62.721,-2.516 66.763,-2.516 66.763,-4.328
  region net MD_RESET: 79.557,-10.739 79.557,-10.78 79.868,-11.092 79.868,-11.506 79.573,-11.802 79.154,-11.802 78.872,-11.519 78.872,-11.079 79.224,-10.726 79.337,-10.726
  region net GND2: 81.978,-15.931 81.17,-15.931 80.449,-15.21 80.408,-15.25 80.079,-15.25 80.079,-16.116 81.292,-17.33 82.14,-17.33
  region net +3.3V: 73.277,-17.635 73.575,-17.932 73.575,-18.334 73.275,-18.634 72.861,-18.634 72.568,-18.341 72.568,-17.923 72.982,-17.508 73.063,-17.508
  region net 52>32: 70.303,-11.535 69.765,-11.535 67.52,-13.78 67.52,-14.339 67.162,-14.697 65.752,-14.697 65.497,-14.442 65.497,-13.257 65.764,-12.989 67.111,-12.989 68.963,-11.137 70.326,-11.137
  region net 32>52: 70.366,-10.137 68.85,-10.137 66.838,-12.149 65.767,-12.149 65.421,-11.803 65.421,-10.779 65.786,-10.414 67.564,-10.414 68.241,-9.737 70.29,-9.737
  region net GND2: 62.976,-10.73
  region net +3.3V: 74.186,-3.642 74.108,-3.72 72.355,-3.72 71.688,-4.387 71.688,-4.844 71.911,-5.067 74.071,-5.067 75.153,-3.985 75.153,-3.725

## Silkscreen, mask and mechanical layers (free items; w line width, h text height)
Top Overlay:
  circle w0.254: c75.565,-15.062 r0.127
  region: -14.732,3.302
  text "ACL" at -15.494,3.429 h0.76
  text "W" at 83.591,0.94 h0.76 r90
  text "GND" at 68.326,-2.237 h0.76
  text "15V" at 62.992,-2.286 h0.76
  text "ACN" at -12.192,-3.429 h0.76
  text "Y" at 83.591,-4.064 h0.76 r90
Bottom Overlay:
  text "ACL" at -13.462,3.429 h0.76
  text "W" at 83.591,1.448 h0.76 r90
  text "ACN" at -10.16,-3.429 h0.76
  text "Y" at 83.617,-3.531 h0.76 r90
  text "3.3" at 67.945,-9.652 h0.76 r270
  text "GND" at 61.595,-9.779 h0.76 r270
  text "GND" at 62.357,-10.287 h0.76 r90
  text "3>5" at 67.945,-12.319 h0.76 r270
  text "GND" at 62.357,-12.827 h0.76 r90
  text "5>3" at 67.945,-14.859 h0.76 r270
  text "CLK" at 62.331,-15.456 h0.76 r90
  text "DIO" at 67.883,-17.36 h0.76 r270
Bottom Solder:
  region: 70.524,-6.742 69.774,-7.493 69.774,-8.035 70.774,-8.035 71.58,-7.23

## Text inside footprints (layer, text, board x,y; h text height)
D4: Top Overlay "AC" at -10.795,-13.208 h0.76 r270; Top Overlay "AC" at -10.668,-9.652 h0.76 r270